# Altium PCB USB to UART With Zigbee V1.0.PcbDoc
Units mil, origin at the board's own origin, x right, y up, seen from the top; angles counter-clockwise.
Board outline 984.25 x 551.18 mil, 2 copper layers (Top Layer, Bottom Layer); 15 components, 14 nets, 74 pads, 10 vias.
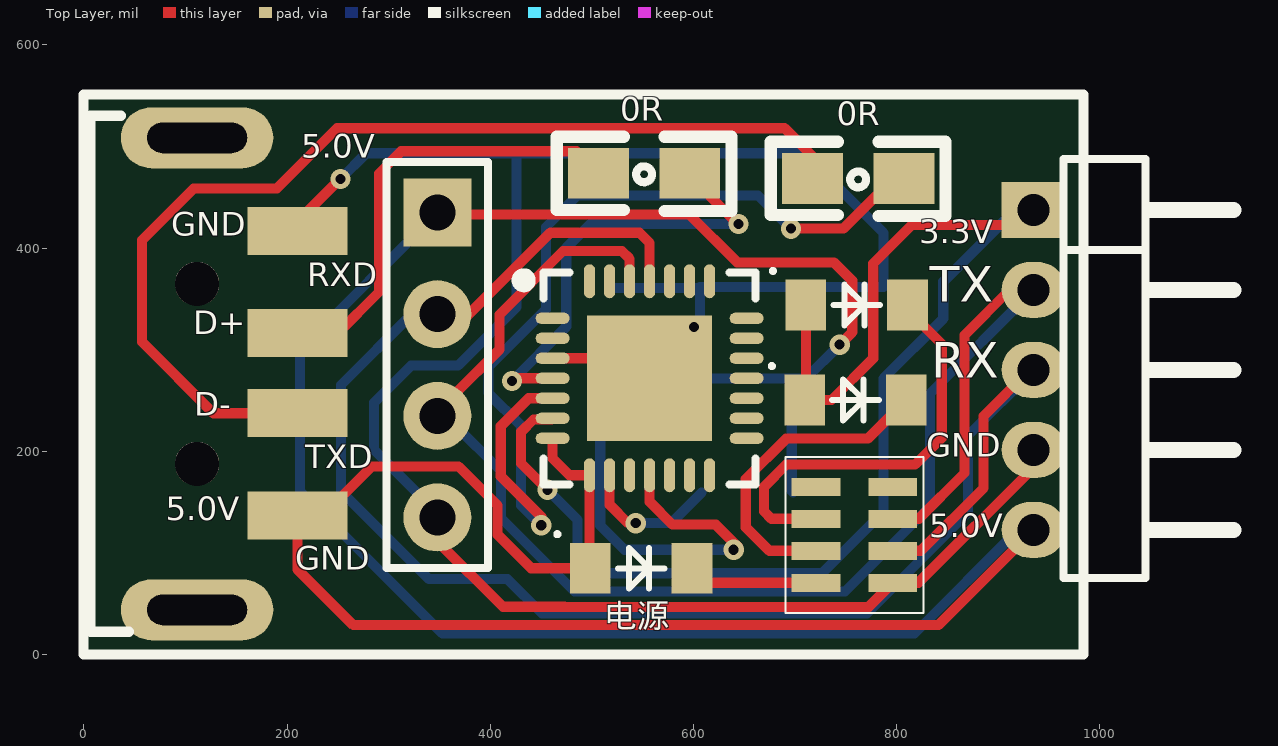
[diagram p0: Top Layer view]
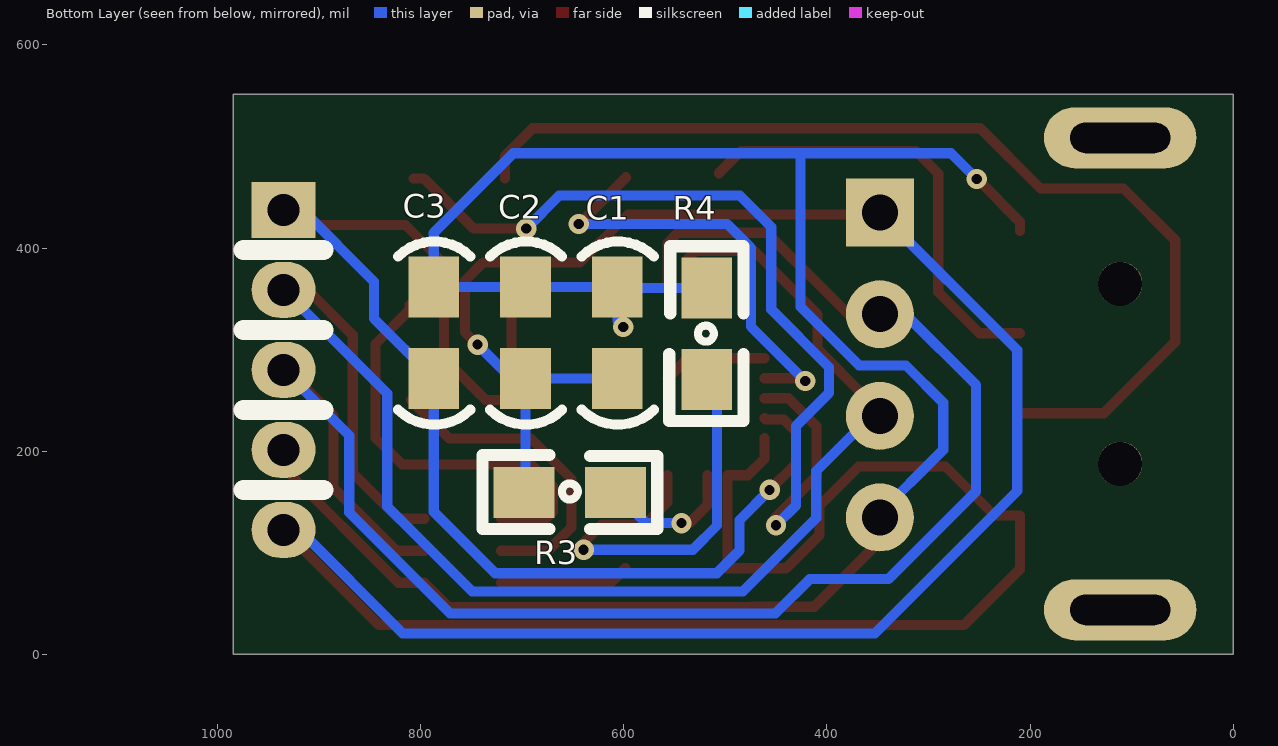
[diagram p1: Bottom Layer view, seen from below]

## Layer stack, top to bottom
Top Solder: solder mask 0.4, Solder Resist, Dk 3.5
Top Layer: signal copper 1.4
Dielectric 1: dielectric 12.6, FR-4, Dk 4.8
Bottom Layer: signal copper 1.4
Bottom Solder: solder mask 0.4, Solder Resist, Dk 3.5

## Board outline
0,0 984.25,0 984.25,551.18 0,551.18

## Design rules (kind name [scope] priority, off if disabled: settings)
Clearance [All] p1: gap=8
PolygonConnect [All] p1: connectstyle=Relief reliefconductorwidth=10 reliefentries=4 polygonreliefangle="90 Angle" airgapwidth=10
RoutingVias [All] p1: holewidth=28 width=50 viastyle="Through Hole" minholewidth=28 minwidth=50 maxholewidth=28 maxwidth=50
SolderMaskExpansion [All] p1: expansion=4
Width [All] p1: maxlimit=10 minlimit=10 preferedwidth=10
30 further rules are at their usual default settings.

## Classes and differential pairs
component class Sheet1: C1 C2 C3 LED1 R3 R4 R5

## Components (designator, comment, footprint, x,y, rotation, side; value= is the part's Value field where it differs from the comment)
0R "0R" 0805R 721.46,467.33 r0 top
0R "0R" 0805R 510.78,472.36 r0 top
C1 "226" 0805C 606.23,356.71 r270 bottom
C2 "104" 0805C 696.59,356.71 r270 bottom
C3 "104" 0805C 786.96,356.71 r270 bottom
R3 "4.7K" 0805R 612.48,160.6 r0 bottom
R4 "4.7K" 0805R 519.35,356.24 r270 bottom
电源 "LED" 0805LED(GREEN) 500.42,86.8 r0 top
? "CP2102" QFN-28 481.6,347.31 r0 top
? "Res-4" 排阻(4位贴片) 722.51,164.49 r0 top
? "LED" 0805LED(GREEN) 711.44,252.36 r0 top
? "LED" 0805LED(GREEN) 712.55,345.92 r0 top
? "USB-A" USB_A/P_B 210.06,136.75 r270 top
? "Pin HDR1X5" "Pin HDR1X5/2mm-W" 934.74,437.61 r270 top
? "Header 4" "Header 4(排母)" 347.24,436.21 r270 top

## Footprints (in the part's own frame and the unit in brackets; to place one, negate y for a bottom-side part, rotate by r counter-clockwise, add the part's x,y. Pads: shape width x height; smd on the part's side, far side on the other; paste and mask are expansions set on the pad)
0805C [mil]
  rect 60x50 smd: 1(-5,0) 2(85,0)
  silkscreen extent -50,-35 131,36, body extent -16,-26 102,29, height 37
0805LED(GREEN) [mil]
  rect 40x50 smd: 1(-2,-2) 2(98,-2)
  silkscreen extent -36,-22 71,33, body extent 7,-27 87,23, height 43
0805R [mil]
  rect 60x50 smd: 1(-4.51,1.2) 2(85.49,1.2)
  silkscreen extent -46,-36 126,37, body extent -1,-23 78,26, height 18
"Header 4(排母)" [mm]
  rect 1.7x1.7 hole 0.9: 1(0.035,0.015)
  round 1.7 hole 0.9: 2(2.575,0.015) 3(5.115,0.015) 4(7.655,0.015)
  silkscreen extent -1.23,-1.25 8.93,1.29, body extent -1.23,-1.25 8.93,1.29, height 8.5
"Pin HDR1X5/2mm-W" [mm]
  rect 1.4x1.6 hole 0.8: 1(0,0)
  oval 1.4x1.6 hole 0.8: 2(2,0) 3(4,0) 4(6,0) 5(8,0)
  silkscreen extent -1.27,0.75 9.2,5, body extent -0.95,-0.32 9,6.93, height 2
QFN-28 [mm] "CP2102  USB转串口芯片"
  rect 3.13x3.13 smd mask+0.051: 0(1.909,-1.918)
  oval 0.85x0.28 smd mask+0.051: 1(-0.516,-0.418) 2(-0.516,-0.918) 3(-0.516,-1.418) 4(-0.516,-1.918) 5(-0.516,-2.418) 6(-0.516,-2.918) 7(-0.516,-3.418) 15(4.334,-3.418) 16(4.334,-2.918) 17(4.334,-2.418) 18(4.334,-1.918) 19(4.334,-1.418) 20(4.334,-0.918) 21(4.334,-0.418)
  oval 0.28x0.85 smd mask+0.051: 8(0.409,-4.343) 9(0.909,-4.343) 10(1.409,-4.343) 11(1.909,-4.343) 12(2.409,-4.343) 13(2.909,-4.343) 14(3.409,-4.343) 22(3.409,0.507) 23(2.909,0.507) 24(2.409,0.507) 25(1.909,0.507) 26(1.409,0.507) 27(0.909,0.507) 28(0.409,0.507)
  silkscreen extent -1.39,-4.57 4.56,0.73, body extent -0.58,-4.42 4.42,0.58, height 1
USB_A/P_B [mm]
  oval 1.524x3.81 hole 0.762 slot 2.5 at 90 deg: 0(-9.443,-2.508) 0(2.357,-2.508)
  round 1.1 hole 1.1: 0(-5.793,-2.508) 0(-1.293,-2.508)
  rect 1.2x2.5 smd: 1(0,0) 2(-2.556,0) 3(-4.556,0) 4(-7.112,0)
  silkscreen extent -9.99,-5.18 2.91,-4.21, body extent -9.91,-20.46 3.04,0.14, height 3.25
排阻(4位贴片) [mm]
  rect 1.22x0.45 smd: 1(-0.051,0.013) 2(1.869,0.013) 3(-0.051,-0.787) 4(1.869,-0.787) 5(-0.051,-1.587) 6(1.869,-1.587) 7(-0.051,-2.387) 8(1.869,-2.387)
  silkscreen extent -0.81,-3.14 2.64,0.76, body extent 0.1,-2.79 1.7,0.41, height 0.59

## Part data
0R 0R R3 R4: library part Res, "电阻"
C1 C2 C3: library part Cap1, "无极贴片电容"
电源 ? ?: "发光二极管"
?: "USB转串口芯片"
?: "排阻"
?: "排针"

## Via types
v1: diameter 20, hole 10, Top Layer to Bottom Layer, 10 vias

## Nets (pads, with @x,y where several pads share a name; then routed paths per layer and width w, separated by ;. In a path a pad name is that pad's centre, name@x,y a point inside that pad or via, vN(x,y) a via of type N, cw(c..) or ccw(c..) an arc to the next point about the centre after c; other vN are vias at no path point)
3.3V: ?.1@709.44,250.36 ?.1@710.55,343.92 ?.1@934.74,437.61 ?.6@461.28,232.44 C3.2 | length 1328.2
  Top Layer w10: v1(456.31,161.92) 430.3,187.94 430.3,219.17 442.39,231.27 460.11,231.27 ?.6@461.28,232.44 ; ?.1@710.55,343.92 710.55,251.47 709.44,250.36 735.72,250.36 776.88,291.53 776.88,384.83 814.77,422.72 916.09,422.72 ?.1@930.71,437.34
  Bottom Layer w10: v1(456.31,161.92) 485.86,132.38 485.86,102.52 508.46,79.92 726.48,79.92 786.96,140.4 C3.2 845.72,330.47 845.72,366.85 916.48,437.61 ?.1@934.74,437.61
5.0V: ?.1@210.06,136.75 ?.1@347.83,434.83 ?.5@934.74,122.65 ?.7@461.28,212.76 ?.8@497.7,176.34 C1.2 C2.2 R3.2 电源.1 | length 3267.7
  Top Layer w10: ?.1@363.61,427.29 369.34,433.02 595.75,433.02 642.92,385.85 738.09,385.85 756.13,367.81 756.13,317.24 v1(743.77,304.88) ; ?.7@461.28,212.76 461.28,192.89 477.84,176.34 497.7,176.34 497.7,85.52 电源.1 440.12,84.8 407.16,117.76 407.16,146.57 368.75,184.97 283.25,184.97 235.02,136.75 210.06,136.75 210.06,83.87 265.13,28.8 840.9,28.8 ?.5@934.74,122.65
  Bottom Layer w10: ?.1@347.83,434.83 212.56,299.57 212.56,160.77 352.75,20.58 817.38,20.58 919.45,122.65 ?.5@934.74,122.65 ; C1.2 C2.2 ; R3.2 696.59,160.77 C2.2 ; v1(743.77,304.88) 710.6,271.71 C2.2
D+: 0R.1@506.26,473.56 ?.3@210.06,316.12 | length 447.7
  Top Layer w10: ?.3@210.06,316.12 249.73,316.12 290.32,356.71 290.32,473.34 312.19,495.21 484.61,495.21 0R.1@506.26,473.56
D-: 0R.1@716.95,468.54 ?.2@210.06,237.38 | length 1020.9
  Top Layer w10: ?.2@210.06,237.38 127.38,237.38 57.09,307.67 57.09,407.64 108.05,458.6 189.72,458.6 249.01,517.89 689.64,517.89 716.95,490.58 0R.1@716.95,468.54
GND: ?.0@556.75,271.81 ?.3@461.28,291.5 ?.4@210.06,416.75 ?.4@347.83,134.83 ?.4@934.74,201.39 ?.8@796.1,70.5 C1.1 C2.1 C3.1 R4.1 | length 2295.1
  Top Layer w10: ?.4@210.06,416.75 210.06,426 v1@251.1,467.05 ; ?.4@347.83,134.83 347.83,111.49 412.43,46.89 472.94,46.89 473.03,46.8 772.4,46.8 796.1,70.5 821.3,70.5 934.74,183.94 ?.4@934.74,201.39 ; ?.3@461.28,291.5 537.07,291.5 ?.0@556.75,271.81
  Bottom Layer w10: v1(252.56,467.88) 277.9,493.22 425.82,493.22 ; ?.4@352.09,134.8 285.46,201.43 285.46,247.7 322.06,284.3 368.25,284.3 425.82,341.87 425.82,493.21 ; R4.1 605.27,360.75 C1.1 ; v1(600.42,322.25) 606.23,328.06 C1.1 ; 425.82,493.21 499.45,493.21 708.67,493.22 786.96,414.93 C3.1 C2.1 C1.1
NetLED1_2: ?.2@810.55,343.92 ?.3@720.51,133.49 | length 418
  Top Layer w10: ?.3@720.51,133.49 676.62,133.49 669.42,140.69 669.42,165.16 691.11,186.85 818.07,186.85 844.2,212.98 844.2,305.56 810.55,339.21 ?.2@810.55,343.92
NetLED2_2: ?.2@809.44,250.36 ?.5@720.51,102 | length 316.3
  Top Layer w10: ?.5@720.51,102 674.64,102 651.42,125.21 651.42,172.62 691.17,212.36 771.44,212.36 ?.2@809.44,250.36
NetLED3_2: ?.7@720.51,70.5 电源.2 | length 128
  Top Layer w10: 电源.2 612.72,70.5 ?.7@720.51,70.5
NetR1_2: 0R.2@596.26,473.56 ?.4@461.28,271.81 | length 438.6
  Top Layer w10: v1(421.27,269.18) 423.91,271.81 ?.4@461.28,271.81 ; 0R.2@597.55,469.65 v1@643.6,423.6
  Bottom Layer w10: v1(421.27,269.18) 474.69,322.59 474.69,400.14 498.15,423.61 v1(644.29,423.61)
NetR2_2: 0R.2@806.95,468.54 ?.5@461.28,252.13 | length 914.1
  Top Layer w10: v1(450.09,127.09) 450.09,135.62 410.3,175.41 410.3,224.63 437.8,252.13 ?.5@461.28,252.13 ; v1(695.9,419.08) 747.45,419.08 796.9,468.54 0R.2@806.95,468.54
  Bottom Layer w10: v1(450.09,127.09) 430.3,146.89 430.3,224.95 398.06,257.19 398.06,282.96 454.72,339.62 454.72,420.75 485.59,451.62 663.36,451.62 v1(695.9,419.08)
NetR3_1: ?.9 R3.1 | length 139.6
  Top Layer w10: ?.9 517.38,147.32 535.5,129.2 v1(543.09,129.2)
  Bottom Layer w10: v1(543.09,129.2) 577.77,129.2 R3.1
NetR4_2: ?.11 R4.2 | length 424.5
  Top Layer w10: ?.11 556.75,150.25 579.3,127.71 621.78,127.71 642.93,106.56 v1(639.4,103.03)
  Bottom Layer w10: R4.2 508.19,260.79 508.19,126.84 531.99,103.05 v1(639.4,103.03)
RXD: ?.2@347.83,334.83 ?.3@934.74,280.13 ?.6@796.1,102 ?.25 | length 1628.8
  Top Layer w10: ?.2@363.61,327.29 371.31,327.29 459.03,415.02 546.75,415.02 556.75,405.02 ?.25 ; ?.6@796.1,102 823.62,102 885.47,163.85 885.47,234.62 ?.3@930.71,279.86
  Bottom Layer w10: ?.2@347.83,334.8 ?.2@352.09,334.8 ; ?.2@347.83,334.83 322.72,334.83 253.06,265.17 253.06,160.63 339.56,74.13 416.93,74.13 450.81,40.25 770.69,40.25 870.08,139.64 870.08,215.46 ?.3@934.74,280.13
TXD: ?.2@934.74,358.87 ?.3@347.83,234.83 ?.4@796.1,133.49 ?.26 | length 1467.4
  Top Layer w10: ?.3@363.61,227.29 363.61,254.87 409.11,300.37 409.11,334.63 471.5,397.02 529.36,397.02 537.07,389.31 ?.26 ; ?.4@796.1,133.49 821.63,133.49 866.67,178.53 866.67,314.27 910.99,358.6 ?.2@930.71,358.6
  Bottom Layer w10: ?.3@363.61,227.29 410.41,180.49 410.41,134.24 482.73,61.92 748.99,61.92 832.69,145.63 832.69,256.82 ?.2@934.74,358.87
pads on no net: ?.0@111.32,43.94 ?.0@111.32,187.64 ?.0@111.32,364.81 ?.0@111.32,508.51 ?.1@461.28,330.87 ?.1@720.51,164.99 ?.2@461.28,311.18 ?.2@796.1,164.99 ?.10 ?.12 ?.13 ?.14 ?.15 ?.16 ?.17 ?.18 ?.19 ?.20 ?.21 ?.22 ?.23 ?.24 ?.27 ?.28

## Silkscreen, mask and mechanical layers (free items; w line width, h text height)
Top Overlay:
  lines w10: -0.39,0 -0.39,551.18 983.86,551.18 983.86,20 983.86,0 -0.39,0
  text "5.0V" at 213.89,481.2 h40
  text "GND" at 85.68,404.16 h40
  text "3.3V" at 822.01,396.9 h40
  text "RXD" at 219.69,354.35 h40
  text "TX" at 832.43,335.08 h60
  text "D+" at 107.42,307.13 h40
  text "RX" at 833.82,260.74 h60
  text "D-" at 108.31,226.94 h40
  text "GND" at 829.12,186.85 h40
  text "TXD" at 217.9,175.27 h40
  text "5.0V" at 80.33,124.4 h40
  text "5.0V" at 831.79,107.55 h40
  text "GND" at 208.1,75.48 h40